# Altium PCB PCB_FT232RL.PcbDoc
Units mil, origin at the board's own origin, x right, y up, seen from the top; angles counter-clockwise.
Board outline not stored, 2 copper layers (Top Layer, Bottom Layer); 10 components, 0 nets, 50 pads, 1 vias.
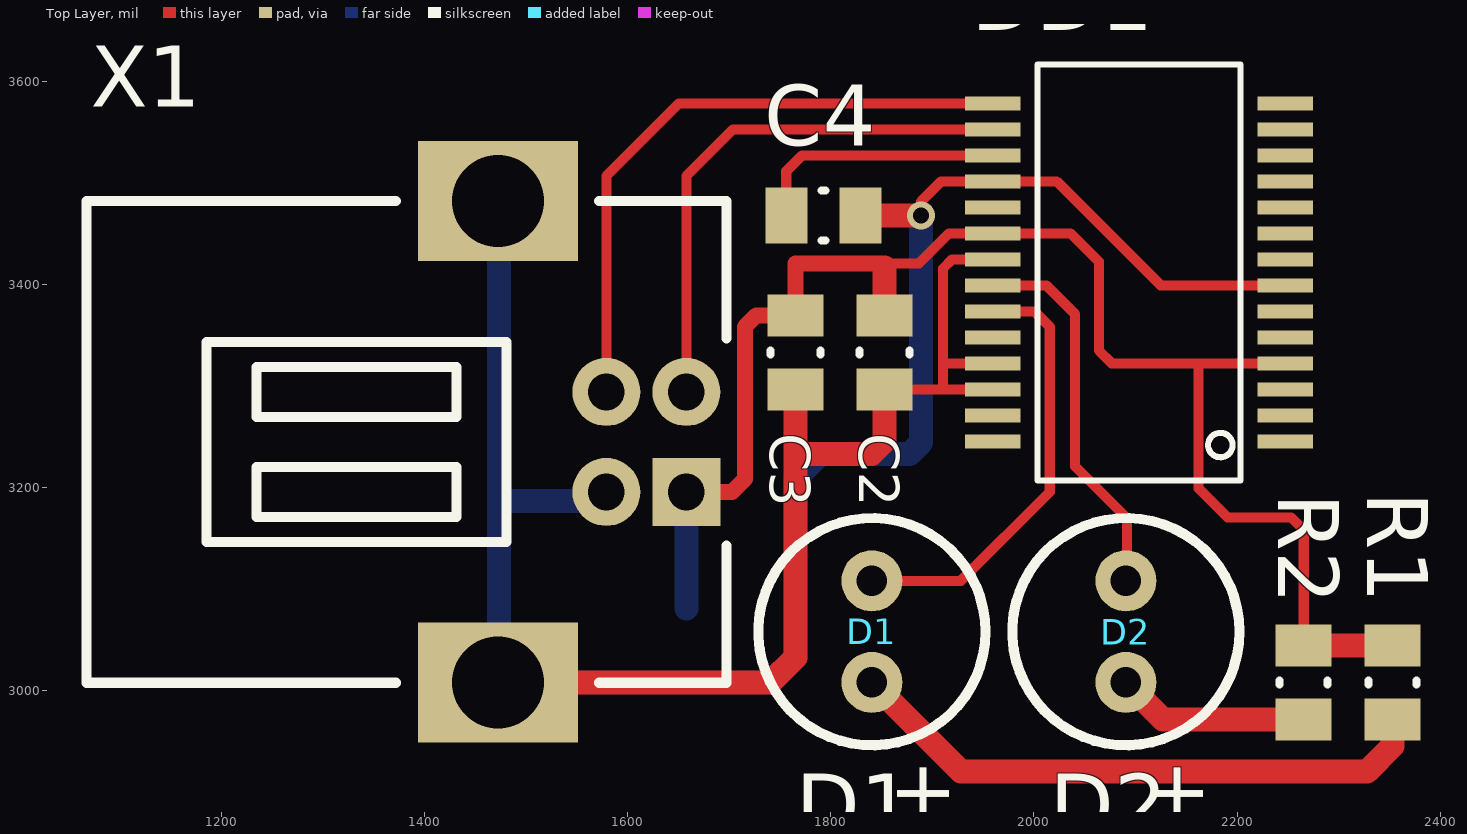
[diagram p0: Top Layer view]
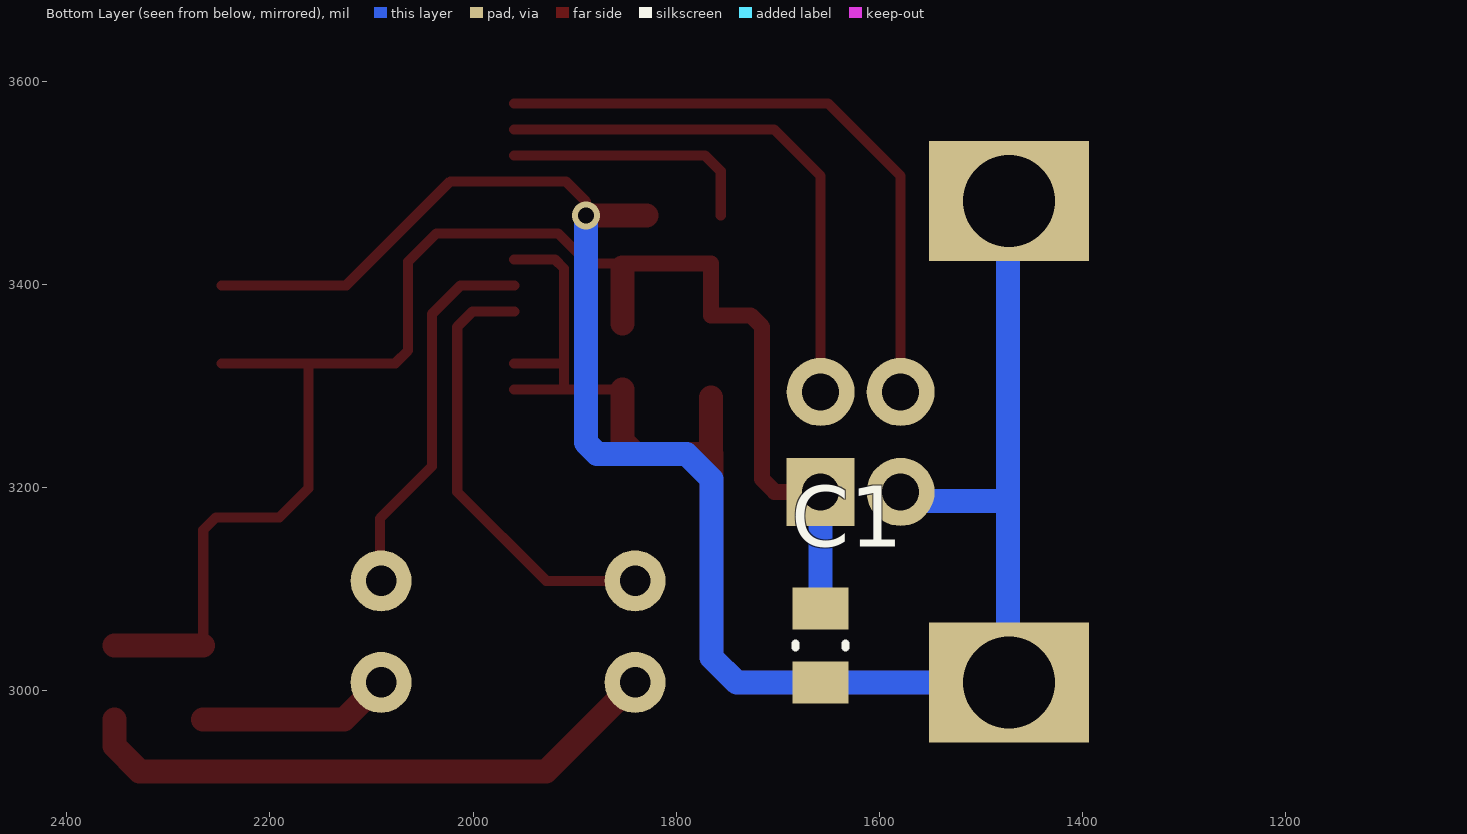
[diagram p1: Bottom Layer view, seen from below]

## Layer stack, top to bottom
Top Solder: solder mask 0.4, Solder Resist, Dk 3.5
Top Layer: signal copper 1.4
Dielectric 1: dielectric 12.6, FR-4, Dk 4.8
Bottom Layer: signal copper 1.4
Bottom Solder: solder mask 0.4, Solder Resist, Dk 3.5

## Components (designator, comment, footprint, x,y, rotation, side; value= is the part's Value field where it differs from the comment)
C1 "10nF" Capacitor_0805 1657.87,3044.29 r270 bottom
C2 "100nF" Capacitor_0805 1853.05,3333.07 r270 top
C3 "4.7uF" Capacitor_0805 1765.55,3333.07 r270 top
C4 "100nF" Capacitor_0805 1792.67,3467.91 r0 top
D1 "LED_2.54mm_R" LED_2.54mm_R 1840.55,3108.17 r270 top
D2 "LED_2.54mm_G" LED_2.54mm_G 2090.55,3108.17 r270 top
DD1 "FT232RL" FT232RL 2103.44,3411.81 r90 top
R1 "270" RESISTOR_SMD0805 2353.05,3008.17 r90 top
R2 "270" RESISTOR_SMD0805 2265.55,3008.17 r90 top
X1 "Connector_USB_typeB" Connector_USB_B 1579.13,3244.88 r270 top

## Footprints (in the part's own frame and the unit in brackets; to place one, negate y for a bottom-side part, rotate by r counter-clockwise, add the part's x,y. Pads: shape width x height; smd on the part's side, far side on the other; paste and mask are expansions set on the pad)
Capacitor_0805 [mm]
  rect 1.05x1.4 smd: 1(-0.925,0) 2(0.925,0)
  silkscreen extent -0.05,-0.63 0.05,0.63, body extent -1,-0.63 1,0.63, height 1.3
Connector_USB_B [mm]
  rect 1.7x1.7 hole 0.92: 1(1.25,2)
  round 1.7 hole 0.92: 2(-1.25,2) 3(-1.25,0) 4(1.25,0)
  rect 3x4 hole 2.3: 4(-6.02,-2.71) 4(6.02,-2.71)
  silkscreen extent -6.02,-13 6.02,3, body extent -6.5,-12.97 6.62,2.97, height 11
FT232RL [mil]
  rect 13.7x55 smd: 1(-166.34,-143.94) 2(-140.75,-143.94) 3(-115.16,-143.94) 4(-89.57,-143.94) 5(-63.98,-143.94) 6(-38.39,-143.94) 7(-12.8,-143.94) 8(12.8,-143.94) 9(38.39,-143.94) 10(63.98,-143.94) 11(89.57,-143.94) 12(115.16,-143.94) 13(140.75,-143.94) 14(166.34,-143.94) 15(166.34,143.94) 16(140.75,143.94) 17(115.16,143.94) 18(89.57,143.94) 19(63.98,143.94) 20(38.39,143.94) 21(12.8,143.94) 22(-12.8,143.94) 23(-38.39,143.94) 24(-63.98,143.94) 25(-89.57,143.94) 26(-115.16,143.94) 27(-140.75,143.94) 28(-166.34,143.94)
  silkscreen extent -205,-100 205,100, body extent -203,-153 203,153, height 85
LED_2.54mm_G [mil]
  round 60 hole 30: 1(0,0) 2(100,0)
  silkscreen extent -62,-112 162,112, body extent -45,-115 165,115, height 343
LED_2.54mm_R [mil]
  round 60 hole 30: 1(0,0) 2(100,0)
  silkscreen extent -62,-112 162,112, body extent -45,-115 165,115, height 343
RESISTOR_SMD0805 [mm]
  rect 1.05x1.4 smd: 1(-0.925,0) 2(0.925,0)
  silkscreen extent -0.05,-0.6 0.05,0.6, body extent -1.1,-0.7 1.1,0.7, height 0.5

## Part data
C1 C2 C3 C4: library part Capacitor
R1 R2: library part Resistor_0805

## Via types
v1: diameter 27.56, hole 15.75, Top Layer to Bottom Layer, 1 vias

## Nets (pads, with @x,y where several pads share a name; then routed paths per layer and width w, separated by ;. In a path a pad name is that pad's centre, name@x,y a point inside that pad or via, vN(x,y) a via of type N, cw(c..) or ccw(c..) an arc to the next point about the centre after c; other vN are vias at no path point)
pads on no net: C1.1 C1.2 C2.1 C2.2 C3.1 C3.2 C4.1 C4.2 D1.1 D1.2 D2.1 D2.2 DD1.1 DD1.2 DD1.3 DD1.4 DD1.5 DD1.6 DD1.7 DD1.8 DD1.9 DD1.10 DD1.11 DD1.12 DD1.13 DD1.14 DD1.15 DD1.16 DD1.17 DD1.18 DD1.19 DD1.20 DD1.21 DD1.22 DD1.23 DD1.24 DD1.25 DD1.26 DD1.27 DD1.28 R1.1 R1.2 R2.1 R2.2 X1.1 X1.2 X1.3 X1.4
copper on no net: | length 7432.7
  Top Layer w10: 1579.13,3294.09 1579.13,3506.59 1650.69,3578.15 1959.51,3578.15 ; 1657.87,3294.09 1657.87,3506.59 1703.84,3552.56 1959.51,3552.56 ; 1756.25,3467.91 1756.25,3511.37 1771.85,3526.97 1959.51,3526.97 ; 1841.56,3120.67 1854.06,3108.17 1928.05,3108.17 2015.55,3195.67 2015.55,3358.17 2000.3,3373.43 1959.51,3373.43 ; 1849.11,3420.67 1886.91,3420.67 1916.44,3450.2 1959.51,3450.2 2036.02,3450.2 2063.98,3422.24 2063.98,3334.74 2076.48,3322.24 2161.93,3322.24 ; 1853.05,3296.65 1910.53,3296.65 ; v1(1889.05,3467.91) 1889.05,3481.67 1908.76,3501.38 1959.51,3501.38 2022.34,3501.38 2124.7,3399.02 2247.38,3399.02 ; 1959.51,3296.65 1910.53,3296.65 ; 1959.51,3322.24 1910.53,3322.24 ; 1959.51,3399.02 2012.2,3399.02 2040.55,3370.67 2040.55,3220.67 2091.56,3169.66 2091.56,3120.67 ; 1959.51,3424.61 1919.49,3424.61 1910.53,3415.65 1910.53,3322.24 ; 2247.38,3322.24 2161.93,3322.24 ; 2265.55,3044.59 2265.55,3158.17 2253.05,3170.67 2190.55,3170.67 2161.93,3199.29 2161.93,3322.24 ; 1910.53,3296.65 1910.53,3322.24
  Top Layer w15.75: 1657.87,3195.67 1703.05,3195.67 1715.55,3208.17 1715.55,3358.17 1726.87,3369.49 1765.55,3369.49 1765.55,3420.67 1849.11,3420.67 1853.05,3416.73
  Top Layer w23.62: 1472.44,3007.87 1740.26,3007.87 1765.26,3032.87 1765.26,3233.17 1765.55,3232.87 ; 1765.55,3288.78 1765.55,3232.87 ; 1829.08,3467.91 v1(1889.05,3467.91) ; 1840.55,3008.17 1928.05,2920.67 2328.05,2920.67 2353.05,2945.67 2353.05,2971.75 ; 1853.05,3296.65 1853.05,3245.67 1840.26,3232.87 1765.55,3232.87 ; 1853.05,3361.61 1853.05,3369.49 1853.05,3416.73 ; 2090.55,3008.17 2126.97,2971.75 2265.55,2971.75 ; 2265.55,3044.59 2353.05,3044.59
  Bottom Layer w23.62: 1472.44,3007.87 1657.87,3007.87 1740.26,3007.87 1765.26,3032.87 1765.26,3208.46 1789.96,3233.17 1877.46,3233.17 1877.76,3232.87 1889.05,3244.17 v1(1889.05,3467.91) ; 1472.44,3481.89 1473.52,3480.81 1473.52,3186.61 ; 1473.52,3024.14 1473.52,3186.61 ; 1567.72,3186.61 1473.52,3186.61 ; 1657.87,3080.71 1657.87,3195.67

## Text inside footprints (layer, text, board x,y; h text height)
D1: Top Overlay "+" at 1865.55,2933.17 h60 r270
D2: Top Overlay "+" at 2115.55,2933.17 h60 r270